# Altium PCB TK531_Utgangstrinn.PcbDoc
Units mm, origin at the board's own origin, x right, y up, seen from the top; angles counter-clockwise.
Board outline 60 x 75 mm, 2 copper layers (Top Layer, Bottom Layer), stack 1.671 mm thick; 16 components, 11 nets, 74 pads, 3 vias.
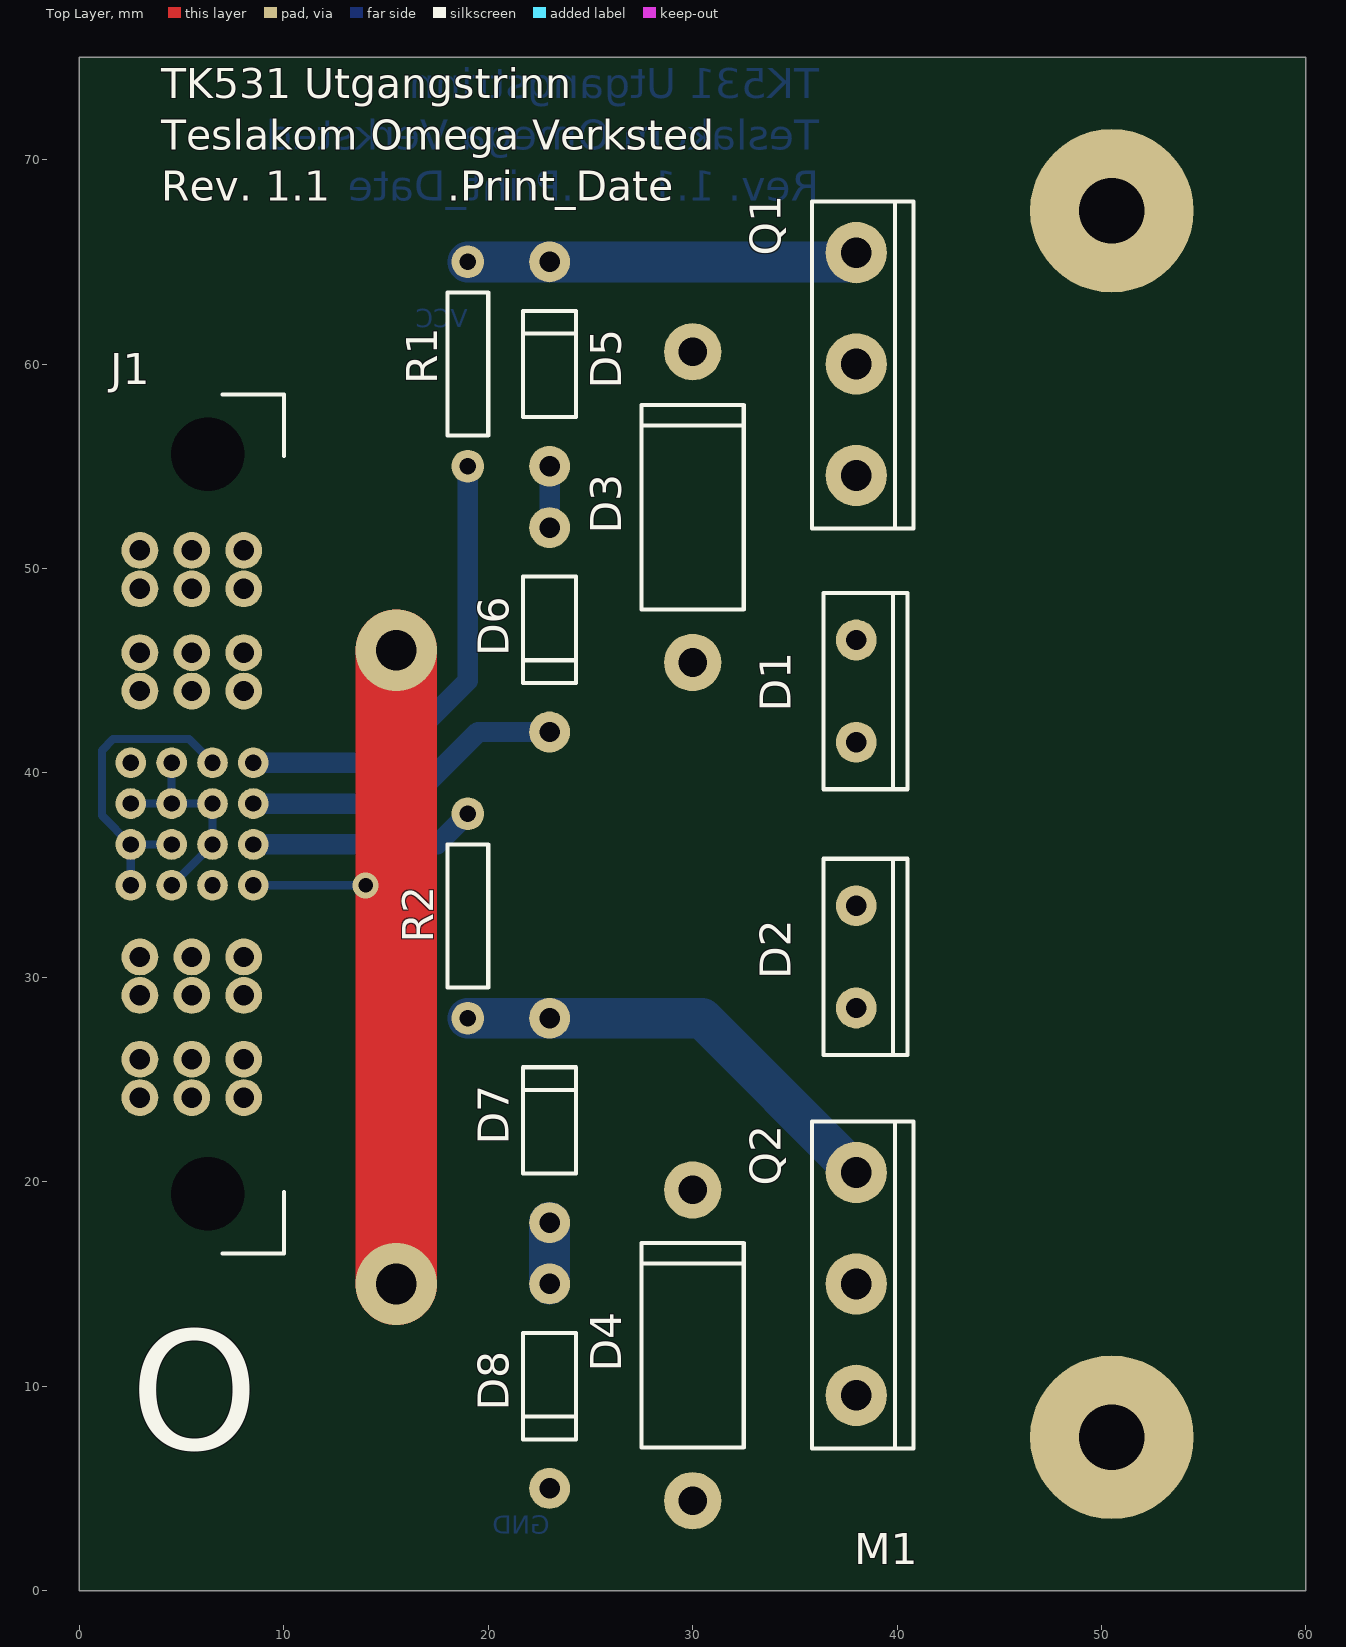
[diagram p0: Top Layer view]
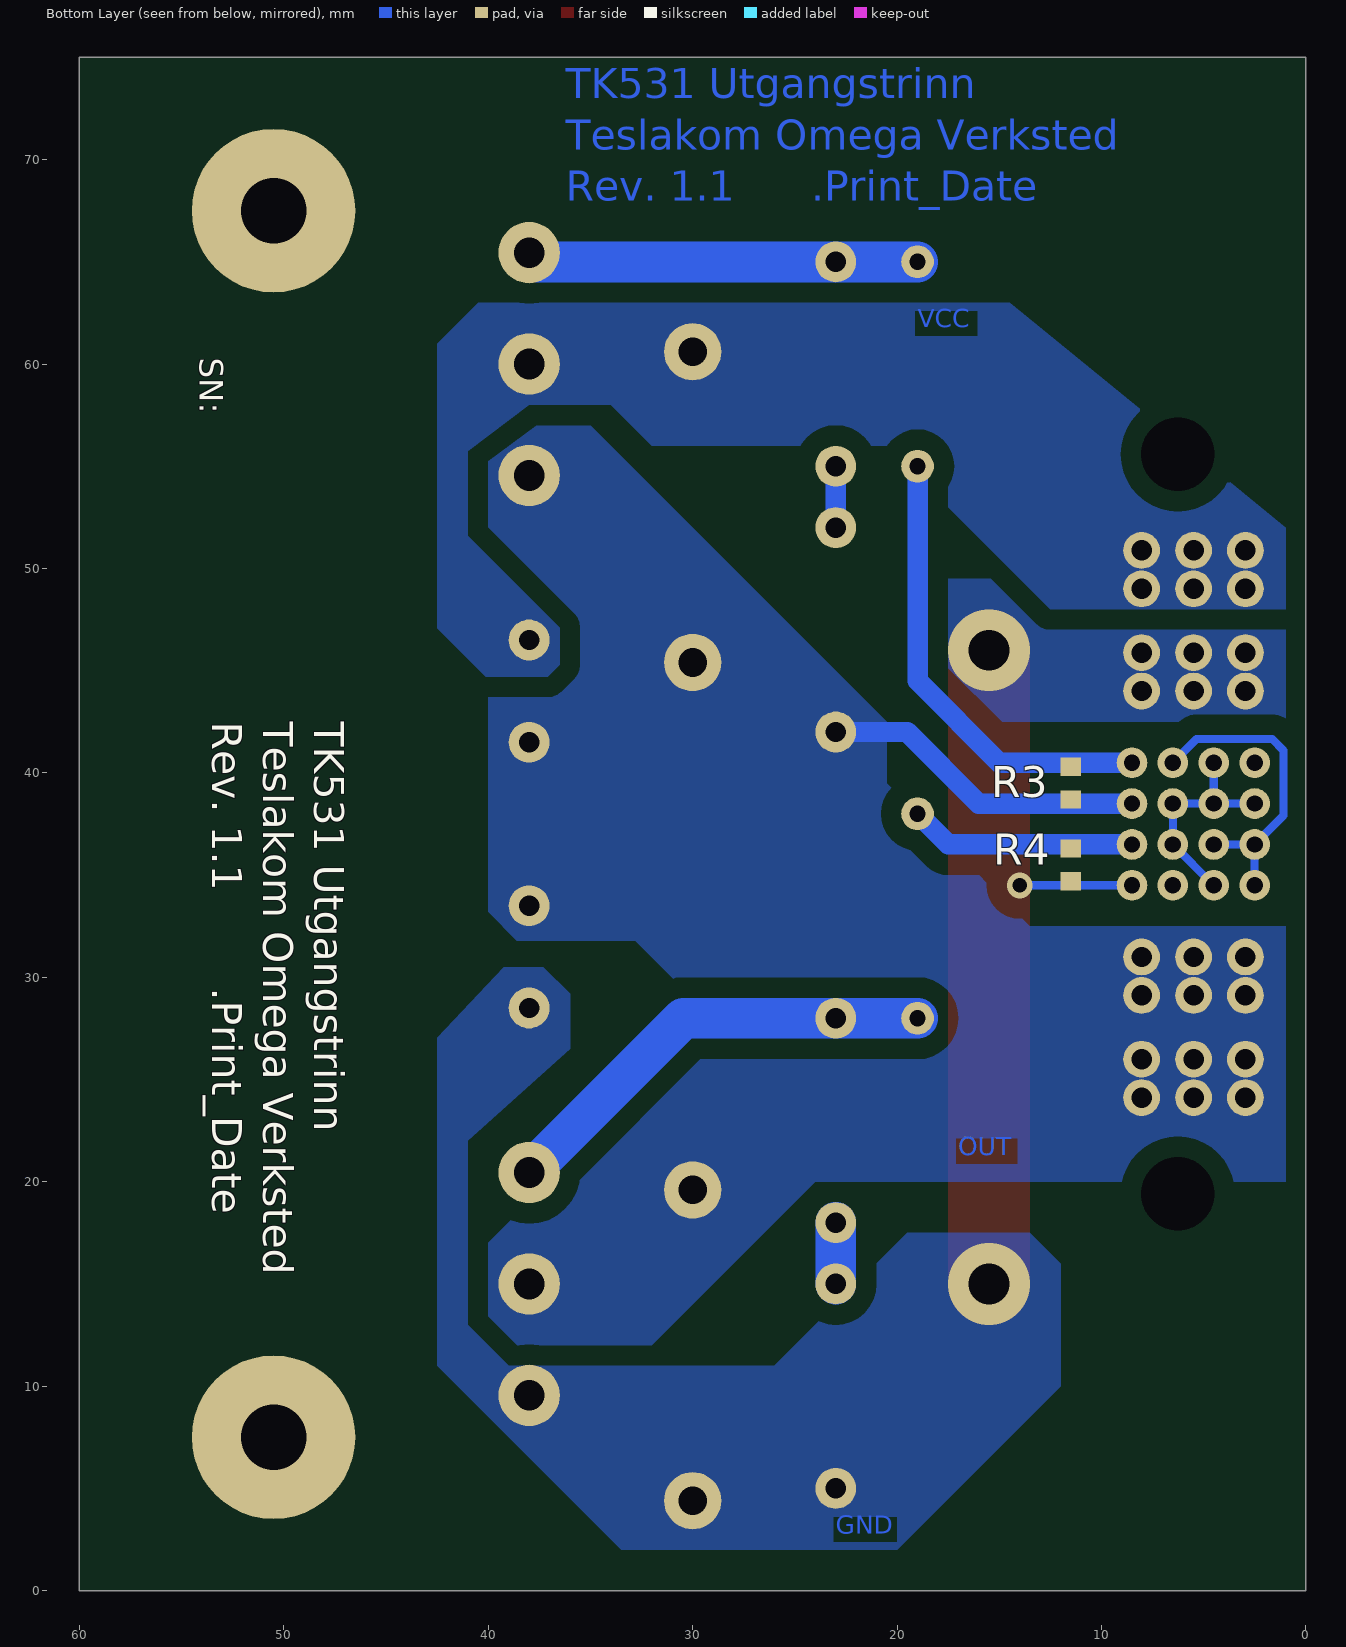
[diagram p1: Bottom Layer view, seen from below]
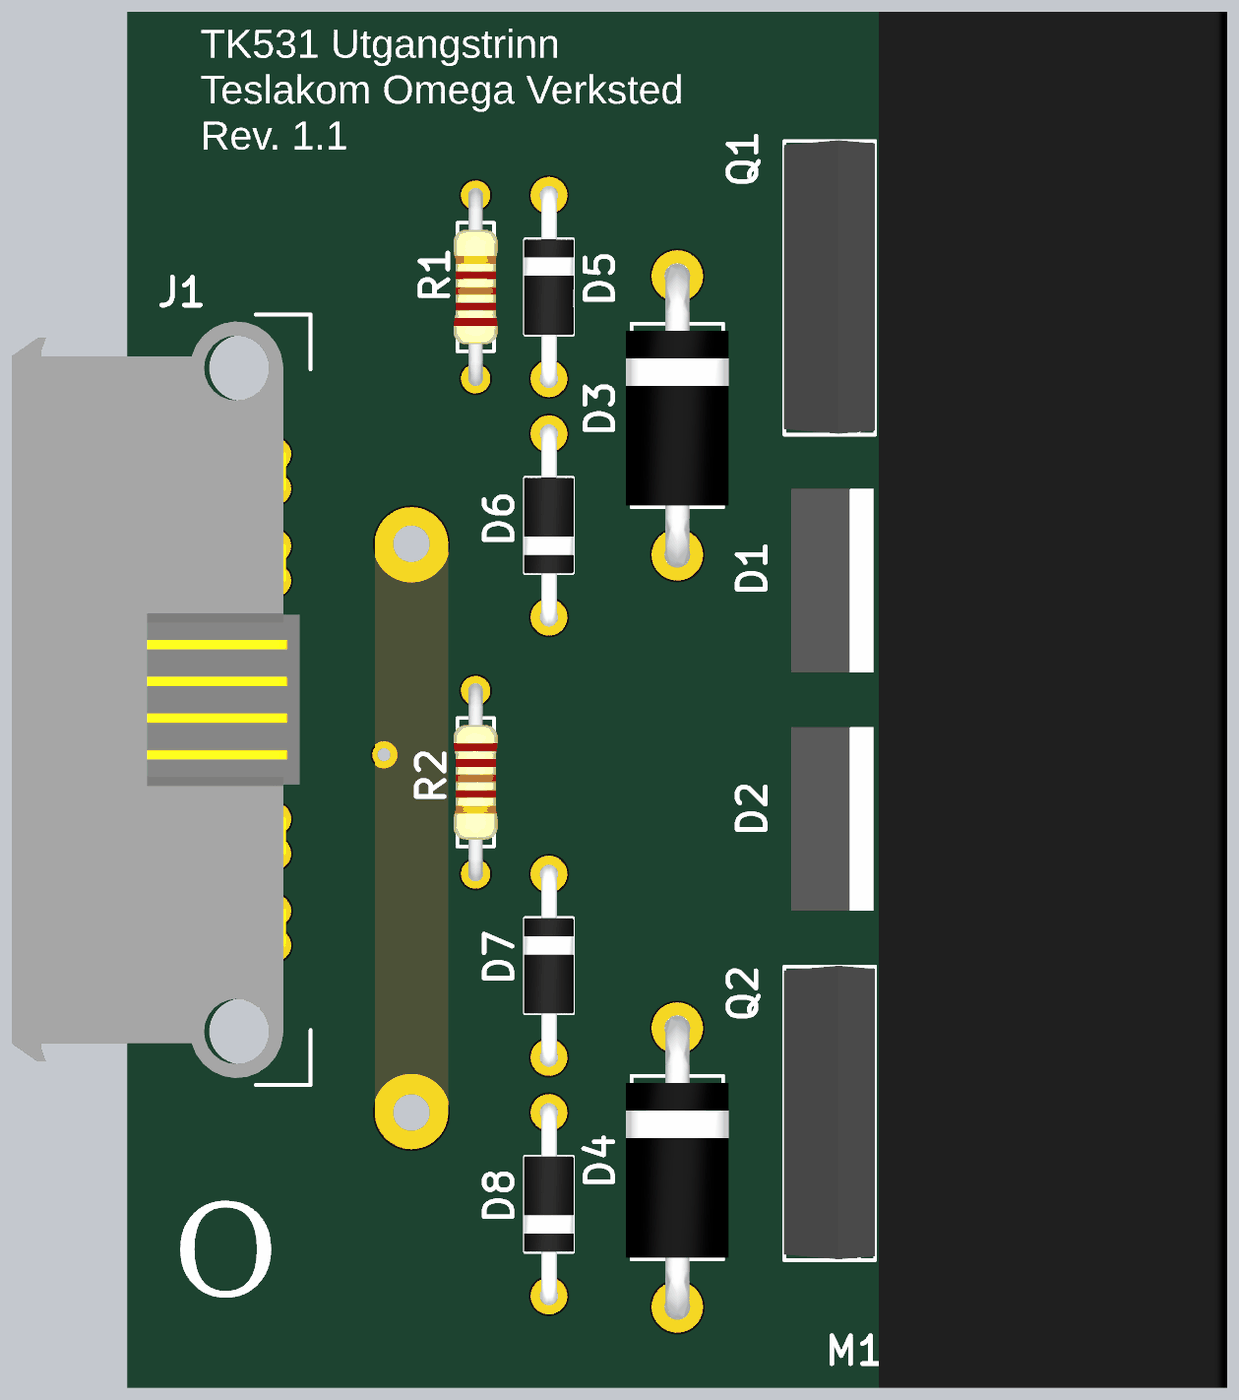
[diagram p2: 3D render of the assembled board from above, using the file's embedded part models]

## Layer stack, top to bottom
Top Solder: solder mask 0.0102, Solder Resist, Dk 3.5
Top Layer: signal copper 0.0356
Dielectric1: dielectric 1.6, FR-4, Dk 4.8
Bottom Layer: signal copper 0.0356
Bottom Solder: solder mask 0.0102, Solder Resist, Dk 3.5

## Board outline
0,0 0,75 60,75 60,0

## Design rules (kind name [scope] priority, off if disabled: settings)
Clearance [All] p1: gap=0.5 ignorepadtopadclearanceinfootprint=FALSE except(0: Arc-Text Arc-Hole Track-Text Track-Hole SMDPad-Text SMDPad-Hole THPad-Text THPad-Hole Via-Text Via-Hole Fill-Text Fill-Hole Poly-Text Poly-Hole Region-Text Region-Hole Text-Text Text-Hole; 0.2: Track-Track Track-SMDPad Track-THPad Track-Via Track-Fill; 1: Arc-Poly Track-Poly SMDPad-Poly THPad-Poly Via-Poly Fill-Fill Fill-Poly Fill-Region Poly-Poly Poly-Region)
HoleSize [All] p1: absolutevalues=TRUE maxlimit=10 minlimit=0.025 maxpercent=80.000 minpercent=20.000
PlaneConnect [All] p1: planeconnectstyle=Relief reliefexpansion=0.508 reliefentries=4 reliefconductorwidth=0.4 reliefairgap=0.254
PolygonConnect [All] p1: connectstyle=Direct reliefconductorwidth=0.6 reliefentries=4 polygonreliefangle="90 Angle" airgapwidth=0.1
RoutingVias [All] p1: holewidth=0.711 width=1.27 viastyle="Through Hole" minholewidth=0.711 minwidth=1.27 maxholewidth=0.711 maxwidth=1.27
ShortCircuit ShortCircuit_1 [InPolygon vs IsText] p1: allowed=TRUE
ShortCircuit [All] p2: allowed=FALSE
SolderMaskExpansion [All] p1: expansion=0.102 istentingtop=FALSE
Width [All] p1: maxlimit=10 minlimit=0.4 preferedwidth=1
27 further rules are at their usual default settings.

## Components (designator, comment, footprint, x,y, rotation, side; value= is the part's Value field where it differs from the comment)
D1 "15ETX06" TO-220-2P 38,44 r270 top
D2 "15ETX06" TO-220-2P 38,31 r270 top
D3 "1V5KE400A" DO-201 30,53 r90 top
D4 "1V5KE400A" DO-201 30,12 r90 top
D5 "1N4744A" DO-41 23,60 r90 top
D6 "1N4744A" DO-41 23,47 r270 top
D7 "1N4744A" DO-41 23,23 r90 top
D8 "1N4744A" DO-41 23,10 r270 top
J1 "MPXX-02-16-02" MPTC-02-16-02-01-03-L-RA-SD 5.5,37.5 r180 top locked
M1 "SK-454-75-SA" SK-454-75-SA 41,0 r0 top
Q1 "G4PC50W" TO-247 38,60 r270 top
Q2 "G4PC50W" TO-247 38,15 r270 top
R1 "10" RESA_0.25W 19,60 r90 top
R2 "10" RESA_0.25W 19,33 r270 top
R3 "1M" RESC0603(1608)_N 11.5,39.5 r90 bottom
R4 "1M" RESC0603(1608)_N 11.5,35.5 r90 bottom

## Footprints (in the part's own frame and the unit in brackets; to place one, negate y for a bottom-side part, rotate by r counter-clockwise, add the part's x,y. Pads: shape width x height; smd on the part's side, far side on the other; paste and mask are expansions set on the pad)
DO-41 [mm]
  round 2 hole 1: 1(-5,0) 2(5,0)
  silkscreen extent -2.6,-1.3 2.6,1.3, body extent -5.51,-1.36 5.51,1.36, height 3.22
DO-201 [mm]
  round 2.8 hole 1.4: 1(-7.6,0) 2(7.6,0)
  silkscreen extent -5,-2.5 5,2.5, body extent -8.28,-2.8 8.28,2.8, height 6.1
MPTC-02-16-02-01-03-L-RA-SD [mm] "SAMTEC"
  round 0 hole 3.6 unplated mask+1: 0(-0.77,18.085) 0(-0.77,-18.085)
  round 1.8 hole 1: 1(-2.54,-11.505) 1(-2.54,-13.385) 1(0,-11.505) 1(0,-13.385) 1(2.54,-11.505) 1(2.54,-13.385) 2(-2.54,-6.505) 2(-2.54,-8.385) 2(0,-6.505) 2(0,-8.385) 2(2.54,-6.505) 2(2.54,-8.385) 3(-2.54,8.385) 3(-2.54,6.505) 3(0,8.385) 3(0,6.505) 3(2.54,8.385) 3(2.54,6.505) 4(-2.54,13.385) 4(-2.54,11.505) 4(0,13.385) 4(0,11.505) 4(2.54,13.385) 4(2.54,11.505)
  round 1.5 hole 0.8: 5(2.99,-3) 6(2.99,-1) 7(2.99,1) 8(2.99,3) 9(0.99,-3) 10(0.99,-1) 11(0.99,1) 12(0.99,3) 13(-1.01,-3) 14(-1.01,-1) 15(-1.01,1) 16(-1.01,3) 17(-3.01,-3) 18(-3.01,-1) 19(-3.01,1) 20(-3.01,3)
  silkscreen extent -4.5,-21 -1.5,21, body extent -3.9,-20.62 11.8,20.62, height 10.82
RESA_0.25W [mm]
  round 1.6 hole 0.8: 1(-5,0) 2(5,0)
  silkscreen extent -3.5,-1 3.5,1, body extent -5.4,-1.2 5.4,1.2, height 2.6
RESC0603(1608)_N [mm] "Chip Resistor, Body 1.6x0.8mm, IPC Medium Density"
  rect 0.9x1 smd: 1(-0.8,0) 2(0.8,0)
  body extent -0.85,-0.47 0.85,0.47, height 0.6
SK-454-75-SA [mm] "Extruded heatsink W=21.45mm, H=19mm, L=75mm"
  body extent 0,0 19,75, height 21.4
TO-220-2P [mm]
  round 2 hole 1: 1(-2.5,0) 3(2.5,0)
  silkscreen extent -4.8,-1.6 4.8,2.5, body extent -5,-1.8 5,2.7, height 19.5
TO-247 [mm]
  round 3 hole 1.5: 1(-5.45,0) 2(0,0) 3(5.45,0)
  silkscreen extent -7.95,-2.16 8.05,2.79, body extent -8,-2.2 8,2.8, height 25.55

## Part data
D1 D2: library part 4891, "DIODE, HYPERFAST, 15A, 600V", id=4891, komponenttype=9, leverandor=Farnell, leverandor_varenr=8656991, navn=15ETX06, pakke_opprettet="28/06/2014 18:52:03", pakke_opprettet_av=815, pakketype=TO-220, pris=26, produsent=Vishay, symbol_opprettet="07/06/2015 11:24:04", symbol_opprettet_av=815
D3 D4: library part 3261, "TVS diode,  400V, 1500W", antall=7, dybde=1, hylle=2, id=3261, komponenttype=9, lager_type=Fremlager, leverandor=Farnell, leverandor_varenr=1017630, navn=1V5KE400A, pakke_opprettet="28/06/2014 17:58:10", pakke_opprettet_av=815, pakketype=DO, pris=7, produsent=Fairchild, rad=2, rom=OV, symbol_opprettet="28/06/2014 15:19:53", symbol_opprettet_av=815
D5 D6 D7 D8: library part 4876, "Zenerdiode 15V 1.3W", id=4876, komponenttype=9, leverandor=Farnell, leverandor_varenr=1612369, navn=1N4744A, pakke_opprettet="28/06/2014 16:50:18", pakke_opprettet_av=815, pakketype=DO, pris=2, produsent=Vishay, symbol_opprettet="28/06/2014 15:11:05", symbol_opprettet_av=815
J1: library part 3221, "SAMTEC Connector", id=3221, komponenttype=11, leverandor=Mouser, leverandor_varenr=MPTC-02-16-02-01-03-L-RA-SD, navn=MPTC-02-16-02-01-03-L-RA-SD, nokkelord="Kan kjøpes rett fra SAMTEC", pakke_opprettet="13/07/2014 16:35:56", pakke_opprettet_av=815, pakketype=TH, pris=30, produsent=SAMTEC, symbol_opprettet="13/07/2014 16:35:21", symbol_opprettet_av=815
M1: library part 4718, "Heatsink", id=4718, leverandor=Farnell, leverandor_varenr=1850030, navn=SK-454-75-SA, nokkelord=Kjøleribbe, pakke_opprettet="07/06/2015 12:19:05", pakke_opprettet_av=815, pakketype=-, pris=14, produsent=FischerElektronik, symbol_opprettet="07/06/2015 12:24:06", symbol_opprettet_av=815
Q1 Q2: library part 4877, "IGBT, 600V, 55A", id=4877, komponenttype=4, leverandor=Farnell, leverandor_varenr=8650632, navn=G4PC50W, nokkelord=Tesla, pakke_opprettet="28/06/2014 15:05:36", pakke_opprettet_av=815, pakketype=TO-247, pris=77, produsent="International Rectifier", symbol_opprettet="28/06/2014 15:03:36", symbol_opprettet_av=815
R1 R2: library part 3890, "0.25W 1% Generic resistor", antall=100, dybde=0, hylle=5, id=3890, komponenttype=1, lager_type=Fremlager, leverandor=Farnell, leverandor_varenr=9341145, navn=10, nokkelord="Motstand, Resistor", pakke_opprettet="28/06/2014 17:13:33", pakke_opprettet_av=815, pakketype=TH, pris=0, produsent=Multicomp, rad=1, rom=OV, symbol_opprettet="08/07/2014 21:16:33", symbol_opprettet_av=815
R3 R4: library part 5340, "0.1W 1% Thick film resistor", antall=100, dybde=119, hylle=2, id=5340, komponenttype=1, lager_type=Fremlager, leverandor=Farnell, leverandor_varenr=2073358, navn=1M, nokkelord="Resistor Motstand", pakke_opprettet="08/07/2014 21:15:30", pakke_opprettet_av=815, pakketype=0603, pris=0, produsent=Multicomp, rad=-1, rom=OV, symbol_opprettet="08/07/2014 21:16:33", symbol_opprettet_av=815

## Free pads (board coordinates)
  round 8 hole 3.2 unplated: 0(50.5,7.5) 0(50.5,67.5)

## Via types
v1: diameter 4, hole 2, Top Layer to Bottom Layer, 2 vias
v2: diameter 1.27, hole 0.711, Top Layer to Bottom Layer, 1 vias

## Nets (pads, with @x,y where several pads share a name; then routed paths per layer and width w, separated by ;. In a path a pad name is that pad's centre, name@x,y a point inside that pad or via, vN(x,y) a via of type N, cw(c..) or ccw(c..) an arc to the next point about the centre after c; other vN are vias at no path point)
GND: J1.7 J1.8 J1.11 J1.13 | length 15.4
  Bottom Layer w0.4: J1.8 J1.7 ; J1.11@4.56,36.45 J1.11 J1.7 ; J1.13 5.36,41.65 1.65,41.65 1.1,41.1 1.1,37.91 J1.7
GND_HVDC: D2.3 D4.1 D8.2 J1.2 J1.20 Q2.3 R4.1 | length 36.5
  Top Layer w4: v1(15.5,15) v1(15.5,46)
  Bottom Layer w0.4: J1.20 v2(14,34.5)
NetD5_1: D5.1 D6.1 | length 3
  Bottom Layer w1: D6.1 D5.1
NetD5_2: D5.2 Q1.1 R1.2 | length 19.2
  Bottom Layer w2: R1.2 D5.2 37.55,65 Q1.1
NetD7_1: D7.1 D8.1 | length 3
  Bottom Layer w2: D8.1 D7.1
NetD7_2: D7.2 Q2.1 R2.2 | length 22.1
  Bottom Layer w2: R2.2 D7.2 30.45,28 Q2.1
NetJ1_17: J1.17 R1.1 R3.2 | length 22.6
  Bottom Layer w1: J1.17 15,40.5 19,44.5 R1.1
NetJ1_19: J1.19 R2.1 R4.2 | length 11.1
  Bottom Layer w1: J1.19 17.5,36.5 R2.1
OUT: D1.3 D2.1 D3.1 D4.2 D6.2 J1.3 J1.4 J1.18 Q1.3 Q2.2 R3.1 | length 15.9
  Bottom Layer w1: J1.18 16,38.5 19.5,42 D6.2
VCC_HVDC: D1.1 D3.2 J1.1 Q1.2
VCC_P5V0: J1.6 J1.9 J1.10 J1.12 J1.14 J1.15 | length 10.8
  Bottom Layer w0.4: J1.6 J1.10 ; J1.12 J1.15 J1.14 J1.10 ; J1.9 J1.10
pads on no net: J1.0 J1.5 J1.16

## Polygon pours and split planes (outlines as drawn)
VCC_HVDC on Bottom Layer "VCC" (solid, remove dead copper, pour order 6): 36.5,45.3 37.1,44.7 40.115,44.7 42.5,47.085 42.5,61 40.5,63 38,63 14.5,63 1,52 1,48 12.5,48 20.51,56.01 32.01,56.01 34,58 38,58 41,55.739 41,51.6 36.5,47.1
GND_HVDC on Bottom Layer "GND" (solid, remove dead copper, pour order 8): 37.3,30.5 36,29.2 36,26.5 41,22 41,13 39,11 32,11 26,11 19.5,17.5 13.5,17.5 12,16 12,10 20,2 33.5,2 42.5,11 42.5,27.033 39.25,30.5
OUT on Bottom Layer "OUT" (solid, remove dead copper, pour order 10): 32,25 30,27 30,29 32.8,31.8 38.608,31.8 40,33.2 40,46 40,55.5 38.5,57 35,57 20.5,42.5 20.5,39.5 13.5,32.5 1,32.5 1,20 13,20 24,20 32,12 39,12 40,13 40,17
GND_HVDC on Bottom Layer "GND" (solid, remove dead copper, pour order 12): 1,42.5 1,47 12.5,47 15,49.5 16.5,49.5 19,49.5 19,44.5 17,42.5

## Other copper
Bottom Layer:
  text "TK531 Utgangstrinn" at 36.2,72.5 h2.5
  text "Teslakom Omega Verksted" at 36.2,70 h2.5
  text ".Print_Date" at 24.2,67.5 h2.5
  text "Rev. 1.1" at 36.2,67.5 h2.5
  text "VCC" at 19,61.5 h1.52
  text "OUT" at 17,21 h1.52
  text "GND" at 23,2.5 h1.52

## Silkscreen, mask and mechanical layers (free items; w line width, h text height)
Top Overlay:
  text "TK531 Utgangstrinn" at 4,72.5 h2.5
  text "Teslakom Omega Verksted" at 4,70 h2.5
  text "Rev. 1.1" at 4,67.5 h2.5
  text ".Print_Date" at 18,67.5 h2.5
  text "O" at 2.5,5 h10
Bottom Overlay:
  text "SN:" at 54.5,60.3 h2 r90
  text "TK531 Utgangstrinn" at 49,42.5 h2.5 r90
  text "Teslakom Omega Verksted" at 51.5,42.5 h2.5 r90
  text "Rev. 1.1" at 54,42.5 h2.5 r90
  text ".Print_Date" at 54,29.5 h2.5 r90
Mechanical 1:
  the board outline again, w0.2